# Altium PCB endpanel_highvoltage.PcbDoc
Units mm, origin at the board's own origin, x right, y up, seen from the top; angles counter-clockwise.
Board outline 128 x 45 mm, 2 copper layers (Top Layer, Bottom Layer); 1 components, 0 nets, 0 pads, 0 vias.
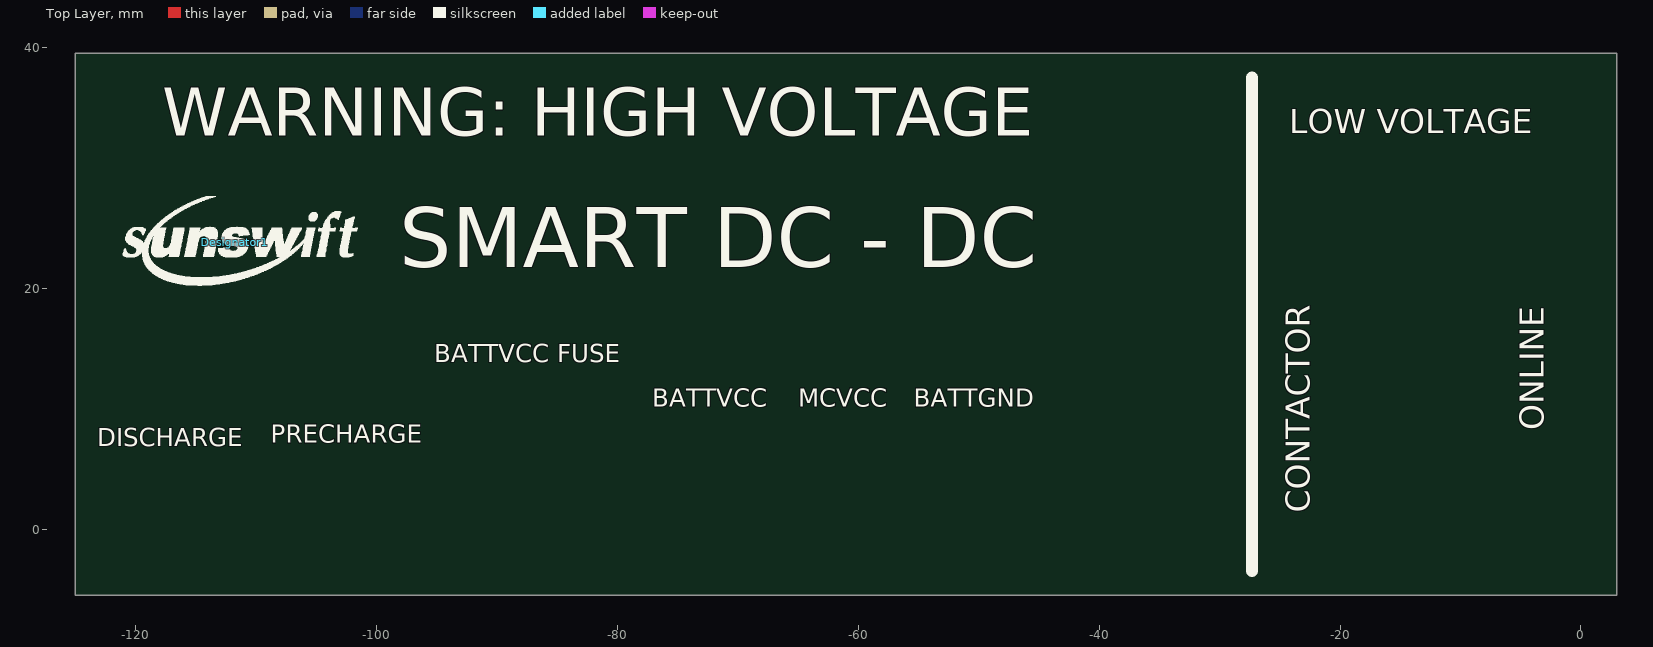
[diagram p0: Top Layer view]
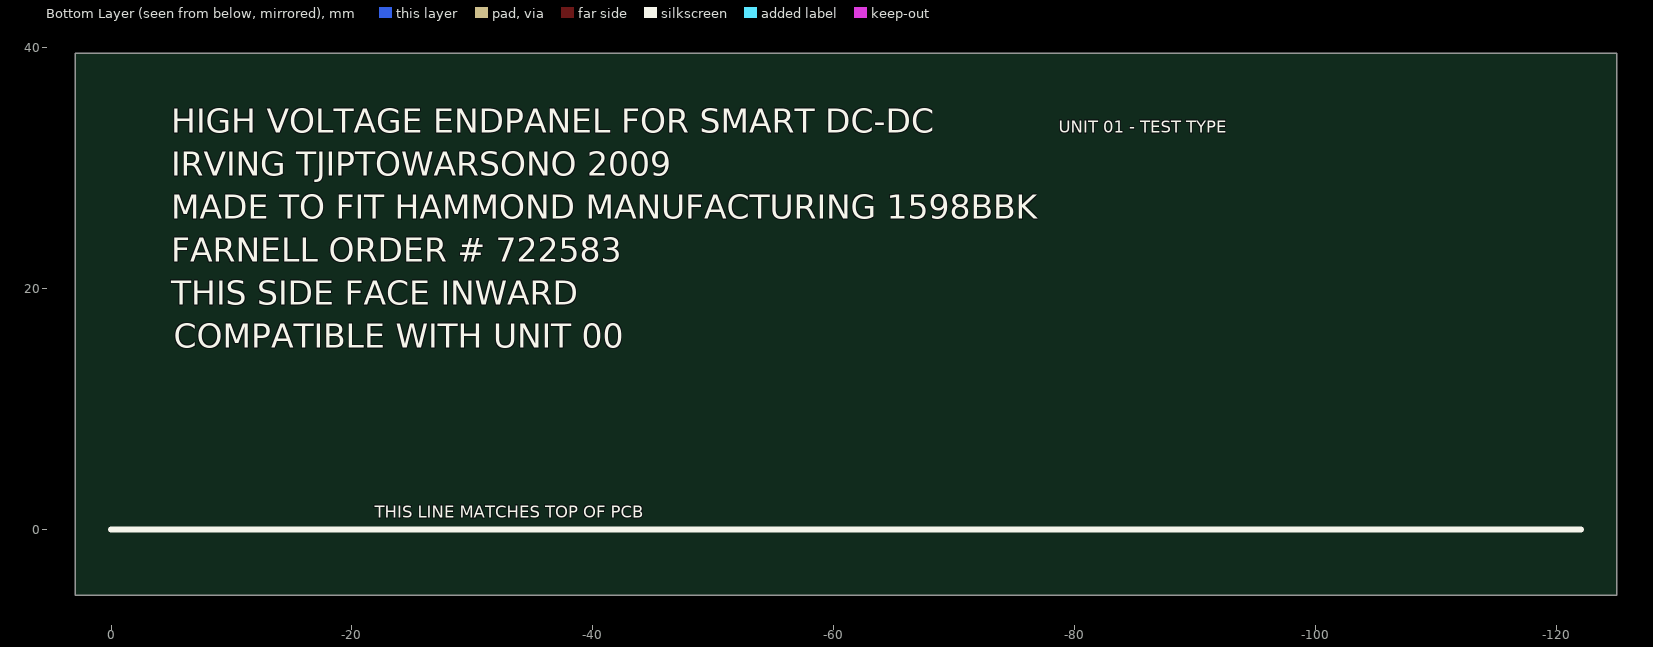
[diagram p1: Bottom Layer view, seen from below]

## Layer stack, top to bottom
Top Layer: signal copper 0.0356
Dielectric: dielectric 0.32, FR-4, Dk 4.8
Bottom Layer: signal copper 0.0356

## Board outline
-125.02,-5.45 -125.02,39.55 2.98,39.55 2.98,-5.45

## Design rules (kind name [scope] priority, off if disabled: settings)
Clearance [All] p1: gap=0.254
PolygonConnect [All] p1: connectstyle=Relief reliefconductorwidth=0.254 reliefentries=4 polygonreliefangle="90 Angle"
RoutingVias [All] p1: holewidth=0.711 width=1.27 viastyle="Through Hole" minholewidth=0.711 minwidth=1.27 maxholewidth=0.711 maxwidth=1.27
SilkscreenOverComponentPads [All] p1: minsilkscreentomaskgap=0.254
SolderMaskExpansion [All] p1: expansion=0.102
TestPointUsage [All] p1: valid=0 allowmultiple=FALSE
Testpoint [All] p1: side=15 testpointundercomponent=TRUE minsize=1.016 maxsize=2.54 preferedsize=1.524 minholesize=0 maxholesize=1.016 preferedholesize=0.813 testpointgrid=0.025 style=1023 order=0-112345678
Width [All] p1: maxlimit=0.254 minlimit=0.254 preferedwidth=0.254
23 further rules are at their usual default settings.

## Components (designator, comment, footprint, x,y, rotation, side; value= is the part's Value field where it differs from the comment)
Designator1 "Comment" SUNSWIFTLOGO -111.76,23.876 r0 top

## Footprints (in the part's own frame and the unit in brackets; to place one, negate y for a bottom-side part, rotate by r counter-clockwise, add the part's x,y. Pads: shape width x height; smd on the part's side, far side on the other; paste and mask are expansions set on the pad)
SUNSWIFTLOGO [mm] "Sunswift Logo"
  silkscreen extent -9.32,-3.58 10.19,3.81

## Nets (pads, with @x,y where several pads share a name; then routed paths per layer and width w, separated by ;. In a path a pad name is that pad's centre, name@x,y a point inside that pad or via, vN(x,y) a via of type N, cw(c..) or ccw(c..) an arc to the next point about the centre after c; other vN are vias at no path point)

## Silkscreen, mask and mechanical layers (free items; w line width, h text height)
Top Overlay:
  lines w1: -27.3,-3.45 -27.3,37.55
  text "LOW VOLTAGE" at -24.2,32.9 h2
  text "WARNING: HIGH VOLTAGE" at -117.8,32.7 h4
  text "SMART DC - DC" at -98.1,21.8 h5
  text "BATTVCC FUSE" at -95.2,13.9 h1.5
  text "BATTVCC" at -77.1,10.2 h1.5
  text "MCVCC" at -65,10.2 h1.5
  text "BATTGND" at -55.4,10.2 h1.5
  text "ONLINE" at -3.1,8.25 h2 r90
  text "PRECHARGE" at -108.8,7.2 h1.5
  text "DISCHARGE" at -123.2,6.9 h1.5
  text "CONTACTOR" at -22.5,1.4 h2 r90
Bottom Overlay:
  lines w0.508: -122.04,0 0,0
  text "UNIT 01 - TEST TYPE" at -78.7,32.95 h1
  text "HIGH VOLTAGE ENDPANEL FOR SMART DC-DC" at -5,32.95 h2
  text "IRVING TJIPTOWARSONO 2009" at -5,29.375 h2
  text "MADE TO FIT HAMMOND MANUFACTURING 1598BBK" at -5,25.8 h2
  text "FARNELL ORDER # 722583" at -5,22.225 h2
  text "THIS SIDE FACE INWARD" at -5,18.65 h2
  text "COMPATIBLE WITH UNIT 00" at -5.2,15.1 h2
  text "THIS LINE MATCHES TOP OF PCB" at -21.9,1 h1
Mechanical 1:
  circle w0.254: c-83.82,6.5 r6.5
  circle w0.254: c-4.318,3.185 r2.6
  circle w0.254: c-103.47,3.185 r2.6
  circle w0.254: c-112.486,3.185 r2.6
  lines w0.254: -125.02,-5.45 2.98,-5.45 2.98,39.55 -125.02,39.55 -125.02,-5.45 ; -75.108,0 -50.108,0 -50.108,9 -75.108,9 -75.108,0 ; -21.031,-0.6 -21.031,16.05 -14.531,16.05 -14.531,-0.6 -21.031,-0.6
Mechanical 16:
  lines w0.127: -203.6,-23.89 -198.52,-23.89 ; -203.6,72.63 -198.52,72.63 ; -130.575,-72.15 -130.575,-67.07 ; -130.575,115.81 -130.575,120.89 ; -57.55,-72.15 -57.55,-67.07 ; -57.55,115.81 -57.55,120.89 ; -30.88,-59.45 83.42,-59.45 ; -30.88,-51.83 83.42,-51.83 ; -30.88,-44.21 7.22,-44.21 ; 7.22,-67.07 7.22,-51.83 7.22,-36.59 ; 15.475,-72.15 15.475,-67.07 ; 15.475,115.81 15.475,120.89 ; 60.56,-67.07 60.56,-51.83 ; 83.42,-23.89 88.5,-23.89 ; 83.42,24.37 88.5,24.37 ; 83.42,72.63 88.5,72.63 ; -30.88,-67.07 -66.44,-67.07 -66.44,-36.59 -30.88,-36.59 ; -30.88,-67.07 83.42,-67.07 ; -30.88,-67.07 -30.88,-36.59 ; -30.88,-36.59 7.22,-36.59 ; 7.22,-36.59 83.42,-36.59 83.42,-67.07 ; 83.42,-67.07 -198.52,-67.07 -198.52,115.81 83.42,115.81 83.42,-67.07 ; -203.6,-72.15 88.5,-72.15 88.5,120.89 -203.6,120.89 -203.6,-72.15
  text "1" at -167.354,117.461 h1.78
  text "2" at -94.71,117.461 h1.78
  text "3" at -21.558,117.461 h1.78
  text "4" at 51.34,117.461 h1.78
  text "A" at -201.695,94.449 h1.78
  text "A" at 85.325,94.449 h1.78
  text "B" at 85.325,46.392 h1.78
  text "C" at -201.695,-2.122 h1.78
  text "C" at 85.325,-2.122 h1.78
  text "ENGINEER:" at -29.61,-39.13 h1.14
  text "TITLE:" at 8.49,-39.13 h1.14
  text "Name" at -27.705,-42.432 h1.78
  text "Title" at 17.507,-46.115 h5.08
  text "PCB DESIGNER:" at -29.61,-46.623 h1.14
  text "Sunswift" at -63.646,-47.004 h5.08
  text "Name" at -27.705,-49.925 h1.78
  text "D" at -201.695,-50.128 h1.78
  text "D" at 85.325,-50.128 h1.78
  text "DATE:" at -29.61,-54.37 h1.14
  text "PART NO.:" at 8.49,-54.37 h1.14
  text "REV:" at 61.83,-54.37 h1.14
  text "Room 109" at -62.63,-56.91 h1.78
  text "Number" at 18.269,-57.291 h1.78
  text ".PRINT_DATE" at -28.34,-57.418 h1.78
  text "Rev" at 66.148,-57.545 h1.78
  text "EE Building" at -62.63,-59.45 h1.78
  text "UNSW, Sydney Australia" at -62.63,-61.99 h1.78
  text "FILE NAME:" at -29.61,-61.99 h1.14
  text "DWG NO:" at 8.49,-61.99 h1.14
  text "SCALE:" at 61.83,-61.99 h1.14
  text "2052" at -62.63,-64.53 h1.78
  text "Number" at 18.904,-64.53 h1.78
  text "Scale" at 67.291,-64.657 h1.78
  text ".PCB_FILE_NAME_NO_PATH" at -28.34,-65.038 h1.78
  text "1" at -167.354,-70.499 h1.78
  text "2" at -94.71,-70.499 h1.78
  text "3" at -21.558,-70.499 h1.78
  text "4" at 51.34,-70.499 h1.78